# EAGLE board final_design_v1 (EAGLE 9.4.0)
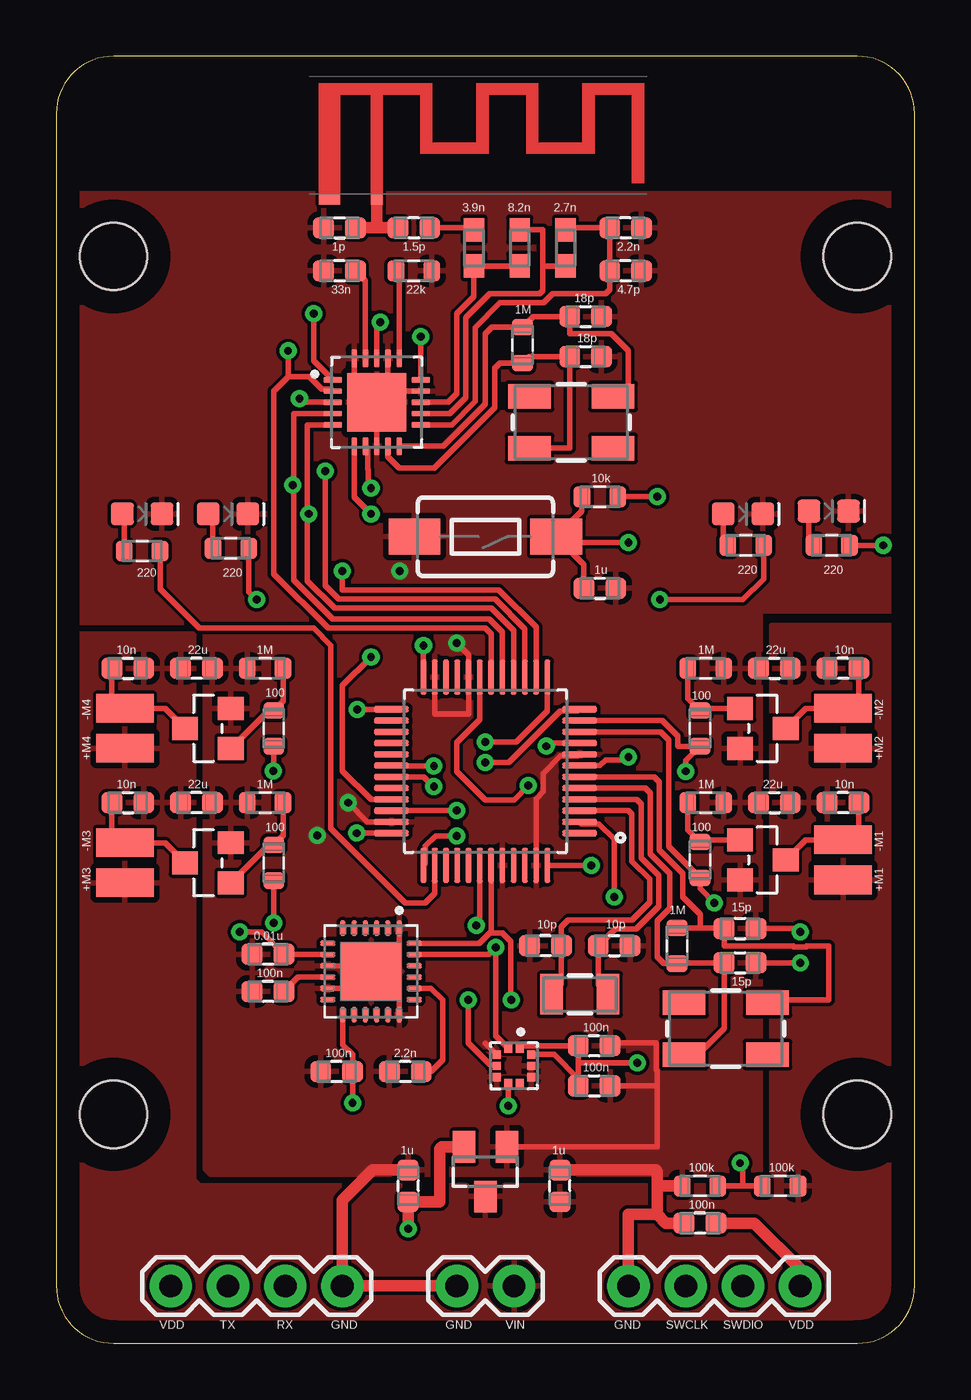
[diagram p0: board, top side]
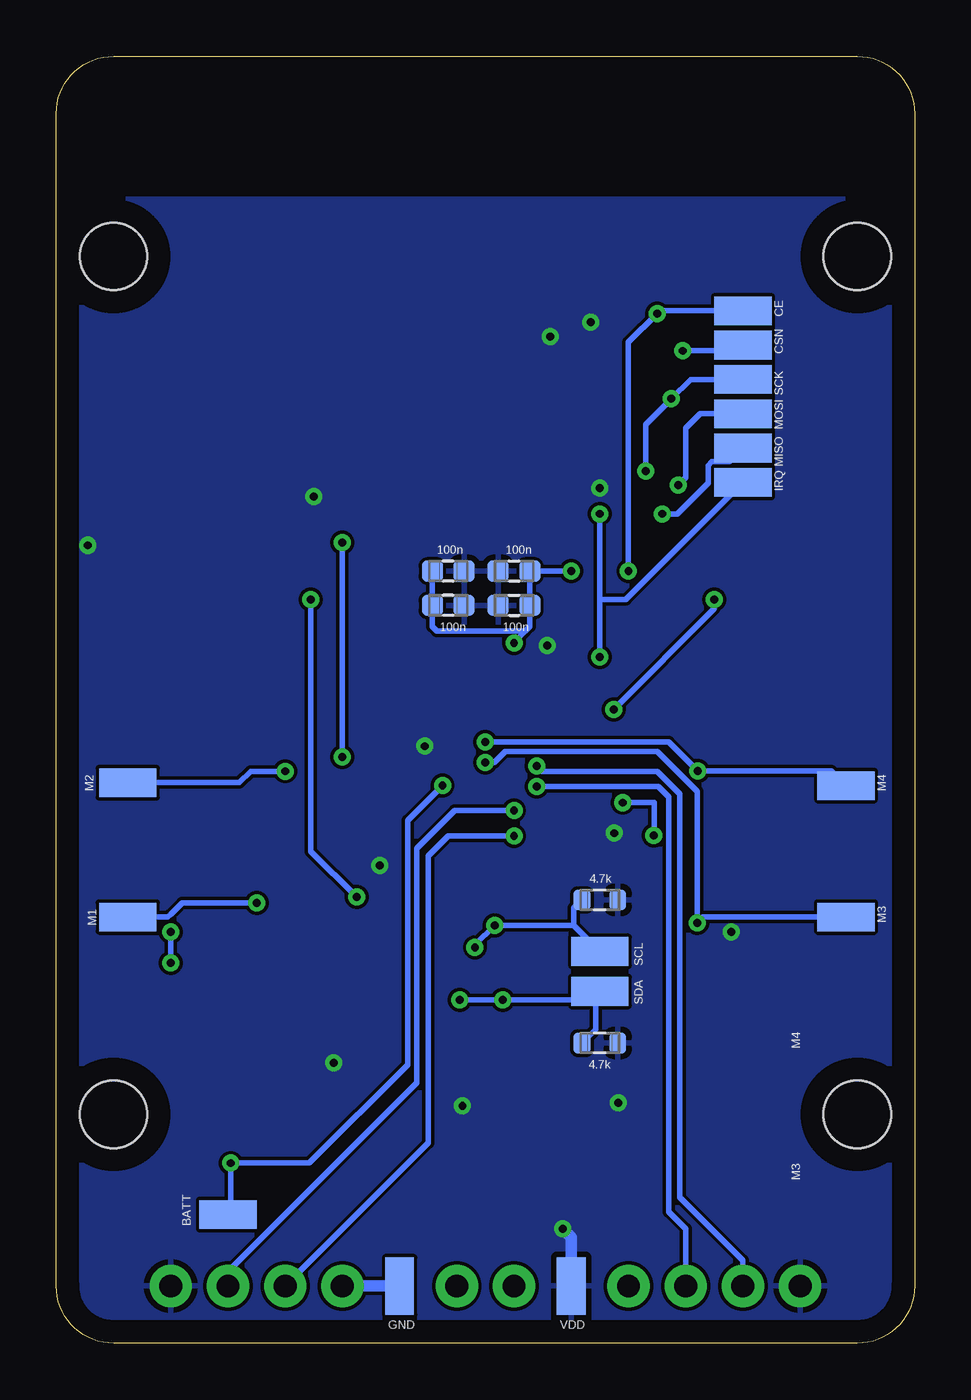
[diagram p1: board, bottom side, seen from below]

Size 38.1 x 57.15 mm. Coordinates in mm from the lower left corner, seen from the top.
Outline: 35.56,57.15 2.54,57.15 arc90 0,54.61 0,2.54 arc90 2.54,0 35.56,0 arc90 38.1,2.54 38.1,54.61 arc90 35.56,57.15
Copper layers (1*16): Top 0.035mm / dielectric 1.5mm / Bottom 0.035mm
Design rules "default": minimum track width 6mil, minimum drill 0.35mm, track to track 6mil, track to pad 6mil, pad to pad 6mil, via to via 6mil, smd to smd 6mil, copper to edge 40mil, drill to drill 6mil, minimum pad ring 10mil, minimum via ring 8mil, stop-mask expansion 4mil, vias tented up to drill 0mil, thermal gap 10mil
Holes 3 mm at 2.54,10.16 35.56,48.26 2.54,48.26 35.56,10.16

## Footprints (pad centres in the part's own frame; a part is rotated, then mirrored left to right if it is on the bottom)
SMD1,27-2,54 = smd 1.27 x 2.54: 1 0,0
CAP_0603 = smd 0.92 x 0.93: 1 -0.705,0; 2 0.705,0
LED-0603 = smd 1 x 1: A -0.877,0; C 0.877,0
TRACE_ANTENNA_2.4GHZ_15.2MM = smd 0.5 x 0.5: ANT 0,-0.25 | smd 0.9 x 0.5: GND -2.1,-0.25
SOT23 = smd 1 x 1.4: 1 -0.95,-1.1; 2 0.95,-1.1; 3 0,1.1
1X04 = drill 1.016 pad 1.88: 1 0,0; 2 2.54,0; 3 5.08,0; 4 7.62,0
1X02 = drill 1.016 pad 1.88: 1 0,0; 2 2.54,0
SOT-23 = smd 1.016 x 1.143: 1 -0.889,-1.016; 2 0.889,-1.016; 3 0,1.016
RES_0603 = smd 0.74 x 0.93: 1 -0.795,0; 2 0.795,0
TACTILE-SWITCH-1101NE = smd 2.3 x 1.6: 1 -3.15,0; 2 3.15,0
QFP50P900X900X160-48N = smd 1.56 x 0.28: 1 -4.18,2.75; 2 -4.18,2.25; 3 -4.18,1.75; 4 -4.18,1.25; 5 -4.18,0.75; 6 -4.18,0.25; 7 -4.18,-0.25; 8 -4.18,-0.75; 9 -4.18,-1.25; 10 -4.18,-1.75; 11 -4.18,-2.25; 12 -4.18,-2.75; 25 4.18,-2.75; 26 4.18,-2.25; 27 4.18,-1.75; 28 4.18,-1.25; 29 4.18,-0.75; 30 4.18,-0.25; 31 4.18,0.25; 32 4.18,0.75; 33 4.18,1.25; 34 4.18,1.75; 35 4.18,2.25; 36 4.18,2.75 | smd 0.28 x 1.56: 13 -2.75,-4.18; 14 -2.25,-4.18; 15 -1.75,-4.18; 16 -1.25,-4.18; 17 -0.75,-4.18; 18 -0.25,-4.18; 19 0.25,-4.18; 20 0.75,-4.18; 21 1.25,-4.18; 22 1.75,-4.18; 23 2.25,-4.18; 24 2.75,-4.18; 37 2.75,4.18; 38 2.25,4.18; 39 1.75,4.18; 40 1.25,4.18; 41 0.75,4.18; 42 0.25,4.18; 43 -0.25,4.18; 44 -0.75,4.18; 45 -1.25,4.18; 46 -1.75,4.18; 47 -2.25,4.18; 48 -2.75,4.18
24-VFQFN = smd 0.26 x 0.69: 1 -1.25,-1.92; 2 -0.75,-1.92; 3 -0.25,-1.92; 4 0.25,-1.92; 5 0.75,-1.92; 6 1.25,-1.92; 13 1.25,1.92; 14 0.75,1.92; 15 0.25,1.92; 16 -0.25,1.92; 17 -0.75,1.92; 18 -1.25,1.92 | smd 0.69 x 0.26: 7 1.92,-1.25; 8 1.92,-0.75; 9 1.92,-0.25; 10 1.92,0.25; 11 1.92,0.75; 12 1.92,1.25; 19 -1.92,1.25; 20 -1.92,0.75; 21 -1.92,0.25; 22 -1.92,-0.25; 23 -1.92,-0.75; 24 -1.92,-1.25 | smd 2.7 x 2.6: 25 0,0
QFN50P400X400X95-21N = smd 0.81 x 0.26: 1 -1.95,1; 2 -1.95,0.5; 3 -1.95,0; 4 -1.95,-0.5; 5 -1.95,-1; 11 1.95,-1; 12 1.95,-0.5; 13 1.95,0; 14 1.95,0.5; 15 1.95,1 | smd 0.26 x 0.81: 6 -1,-1.95; 7 -0.5,-1.95; 8 0,-1.95; 9 0.5,-1.95; 10 1,-1.95; 16 1,1.95; 17 0.5,1.95; 18 0,1.95; 19 -0.5,1.95; 20 -1,1.95 | smd 2.6 x 2.6: 21 0,0
PQFN50P200X200X80-10N = smd 0.35 x 0.38: 1 -0.765,0.25; 2 -0.765,-0.25; 3 -0.5,-0.765; 4 0,-0.765; 5 0.5,-0.765; 6 0.765,-0.25; 7 0.765,0.25; 8 0.5,0.765; 9 0,0.765; 10 -0.5,0.765
RESC0603_N = smd 1.05 x 0.9: 1 -0.8,0; 2 0.8,0
CRYSTAL-SMD-5X3.2-4PAD = smd 1.9 x 1.1: 1 -1.85,-1.15; 2 1.85,-1.15; 3 1.85,1.15; 4 -1.85,1.15
CRYSTAL-SMD-3.2X1.5MM = smd 1 x 1.8: P$1 -1.25,0; P$2 1.25,0

## Placement (x,y rotation side)
+M1  [SMD1,27-2,54]  34.92,20.57 90 top
+M2  [SMD1,27-2,54]  34.92,26.42 90 top
+M3  [SMD1,27-2,54]  3.05,20.45 90 top
+M4  [SMD1,27-2,54]  3.05,26.42 90 top
+M5  [SMD1,27-2,54]  13.97,15.62 270 bottom
+M6  [SMD1,27-2,54]  13.97,17.4 270 bottom
+M7  [SMD1,27-2,54]  3.05,24.77 90 bottom
+M8  [SMD1,27-2,54]  3.05,18.92 270 bottom
+M9  [SMD1,27-2,54]  34.92,24.89 270 bottom
+M10  [SMD1,27-2,54]  34.92,18.92 270 bottom
+M13  [SMD1,27-2,54]  7.62,45.85 270 bottom
+M14  [SMD1,27-2,54]  7.62,44.32 270 bottom
+M15  [SMD1,27-2,54]  7.62,41.27 270 bottom
+M16  [SMD1,27-2,54]  7.62,39.75 270 bottom
+M17  [SMD1,27-2,54]  7.62,38.23 270 bottom
+M18  [SMD1,27-2,54]  15.24,2.54 0 bottom
+M19  [SMD1,27-2,54]  22.86,2.54 0 bottom
+M20  [SMD1,27-2,54]  30.48,5.71 90 bottom
+M22  [SMD1,27-2,54]  7.62,42.8 270 bottom
-M1  [SMD1,27-2,54]  34.92,22.35 90 top
-M2  [SMD1,27-2,54]  34.92,28.19 90 top
-M3  [SMD1,27-2,54]  3.05,22.23 90 top
-M4  [SMD1,27-2,54]  3.05,28.19 90 top
C1  10n  [CAP_0603]  34.92,24 180 top
C2  22u  [CAP_0603]  31.88,24 0 top
C3  100n  [CAP_0603]  9.4,15.62 180 top
C4  0.01u  [CAP_0603]  9.4,17.27 180 top
C5  100n  [CAP_0603]  12.45,12.06 180 top
C6  2.2n  [CAP_0603]  15.49,12.06 180 top
C7  18p  [CAP_0603]  23.5,45.59 0 top
C8  18p  [CAP_0603]  23.5,43.81 0 top
C9  1.5p  [CAP_0603]  15.88,49.53 180 top
C10  1p  [CAP_0603]  12.57,49.53 0 top
C11  4.7p  [CAP_0603]  25.27,47.62 180 top
C12  2.2n  [CAP_0603]  25.27,49.53 180 top
C13  33n  [CAP_0603]  12.57,47.62 180 top
C14  100n  [CAP_0603]  23.88,11.43 0 top
C15  100n  [CAP_0603]  23.88,13.21 180 top
C16  15p  [CAP_0603]  30.35,16.89 0 top
C17  15p  [CAP_0603]  30.35,18.41 0 top
C18  100n  [CAP_0603]  20.7,32.77 180 bottom
C19  100n  [CAP_0603]  20.7,34.29 180 bottom
C20  100n  [CAP_0603]  17.78,32.77 0 bottom
C21  100n  [CAP_0603]  17.78,34.29 0 bottom
C22  1u  [CAP_0603]  24.13,33.53 0 top
C23  10n  [CAP_0603]  34.92,29.97 180 top
C24  1u  [CAP_0603]  22.35,6.99 90 top
C25  1u  [CAP_0603]  15.62,6.99 90 top
C29  100n  [CAP_0603]  28.57,5.33 180 top
C30  10p  [CAP_0603]  21.72,17.65 180 top
C31  10p  [CAP_0603]  24.77,17.65 0 top
C32  22u  [CAP_0603]  31.88,29.97 0 top
C33  10n  [CAP_0603]  3.17,24 0 top
C34  22u  [CAP_0603]  6.22,24 180 top
C35  10n  [CAP_0603]  3.17,29.97 0 top
C36  22u  [CAP_0603]  6.22,29.97 180 top
D1  [LED-0603]  34.29,36.96 0 top
D2  [LED-0603]  30.48,36.83 0 top
D3  [LED-0603]  3.81,36.83 0 top
D4  [LED-0603]  7.62,36.83 0 top
E1  ANTENNA-GROUNDEDTRACE-15.2MM  [TRACE_ANTENNA_2.4GHZ_15.2MM]  14.22,51.05 0 top
IC1  MCP1700  [SOT23]  19.05,7.62 180 top
J1  [1X04]  12.7,2.54 180 top
J2  [1X04]  25.4,2.54 0 top
J3  [1X02]  17.78,2.54 0 top
Q1  SI2300  [SOT-23]  31.37,21.46 270 top
Q2  SI2300  [SOT-23]  31.37,27.3 270 top
Q3  SI2300  [SOT-23]  6.73,21.34 90 top
Q4  SI2300  [SOT-23]  6.73,27.3 90 top
R1  220  [RES_0603]  30.61,35.43 180 top
R2  22k  [RES_0603]  15.88,47.62 0 top
R3  1M  [RES_0603]  27.56,17.65 270 top
R4  1M  [RES_0603]  20.7,44.32 270 top
R5  10k  [RES_0603]  24.13,37.59 0 top
R6  220  [RES_0603]  34.42,35.43 180 top
R7  4.7k  [RES_0603]  13.97,19.68 0 bottom
R8  4.7k  [RES_0603]  13.97,13.34 0 bottom
R11  100  [RES_0603]  28.57,21.46 90 top
R12  1M  [RES_0603]  28.83,24 0 top
R13  100  [RES_0603]  28.57,27.3 90 top
R14  1M  [RES_0603]  28.83,29.97 0 top
R15  100  [RES_0603]  9.65,21.34 90 top
R16  1M  [RES_0603]  9.27,24 180 top
R17  100  [RES_0603]  9.65,27.3 90 top
R18  1M  [RES_0603]  9.27,29.97 180 top
R19  220  [RES_0603]  3.81,35.18 180 top
R20  220  [RES_0603]  7.75,35.31 180 top
R21  100k  [RES_0603]  32.13,6.99 180 top
R22  100k  [RES_0603]  28.57,6.99 180 top
S2  RS032G05A3SM-SPST-MOMENTARY-SWSMD-1101NE  [TACTILE-SWITCH-1101NE]  19.05,35.81 180 top
U1  STM32F103C8T6  [QFP50P900X900X160-48N]  19.05,25.4 180 top
U2  MPU-6050  [24-VFQFN]  13.97,16.51 180 top
U4  NRF24L01  [QFN50P400X400X95-21N]  14.22,41.78 0 top
U6  BMP388  [PQFN50P200X200X80-10N]  20.32,12.32 270 top
U$1  8.2n  [RESC0603_N]  20.57,48.64 90 top
U$2  2.7n  [RESC0603_N]  22.61,48.64 90 top
U$3  3.9n  [RESC0603_N]  18.54,48.64 90 top
Y1  8MHz  [CRYSTAL-SMD-5X3.2-4PAD]  29.72,13.97 0 top
Y3  16MHz  [CRYSTAL-SMD-5X3.2-4PAD]  22.86,40.89 0 top
Y4  32.768kHz  [CRYSTAL-SMD-3.2X1.5MM]  23.24,15.49 0 top

## Library data of the parts
+M1-+M10 +M13-+M20 +M22 -M1--M4 = wirepad
C1-C25 C29-C36 = Resistor_Capacitor; CREATED_BY: PCBLayout.com; DIGIKEY_PART_NUMBER: 399-7814-2-ND; MANUFACTURER: KEMET; MPN: C0603C100C5GACTU; PACKAGE: SMD 0603
D1-D4 = SparkFun-LED
E1 = SparkFun-RF
IC1 = linear
J1 J2 = SparkFun-Connectors; PROD_ID: CONN-09696
J3 = SparkFun-Connectors
Q1-Q4 = OPL_Discrete_Semiconductor; MPN: 2N7002,215
R1-R8 R11-R22 = Resistor_Capacitor; CREATED_BY: PCBLayout.com; DIGIKEY_PART_NUMBER: 311-0.0GRTR-ND; MANUFACTURER: Yageo; MPN: RC0603JR-070RL; PACKAGE: SMD 0603
S2 = BeagleBone_Blue_R3; PROD_ID: SWCH-00815
U1 = STM32F103C8T6; AVAILABILITY: Warning; DESCRIPTION: ARM® Cortex®-M3 STM32F1 Microcontroller IC 32-Bit 72MHz 64KB (64K x 8) FLASH 48-LQFP (7x7); MF: STMicroelectronics; MP: STM32F103C8T6; PACKAGE: LQFP-48 STMicroelectronics; PRICE: None; PURCHASE-URL: https://pricing.snapeda.com/search/part/STM32F103C8T6/?ref=eda; SPICEPREFIX: X
U2 = Sensor; CREATED_BY: PCBLayout.com; DIGIKEY_PART_NUMBER: 1428-1007-1-ND; MANUFACTURER: TDK InvenSense; MPN: MPU-6050; PACKAGE: 24-VFQFN
U4 = NRF24L01; AVAILABILITY: Warning; DESCRIPTION: IC RF TxRx Only General ISM > 1GHZ 2.4GHz 20-VFQFN Exposed Pad; MF: Nordic; MP: NRF24L01; PACKAGE: VFQFN-20 Nordic Semiconductor; PRICE: None; PURCHASE-URL: https://pricing.snapeda.com/search/part/NRF24L01/?ref=eda
U6 = BMP388; DESCRIPTION: Pressure Sensor 4.35PSI ~ 18.13PSI (30kPa ~ 125kPa) Absolute 10-WFLGA; DIGI-KEY_PART_NUMBER: 828-1079-1-ND; MF: Bosch Sensortec; MP: BMP388; PACKAGE: WFLGA-10 Bosch Tools; PURCHASE-URL: https://pricing.snapeda.com/search/part/BMP388/?ref=eda
U$1-U$3 = Nordic_nRF
Y1 = SparkFun-Clocks; PROD_ID: XTAL-09431
Y3 = SparkFun-Clocks; PROD_ID: XTAL-08218; SF_ID: COM-00094
Y4 = SparkFun-Clocks; PROD_ID: XTAL-13062

## Nets
ANT1: U4.12 U$1.2 U$2.1
ANT2: U4.13 U$1.1 U$3.1
BATT_READING: +M20.1 R21.2 R22.1 U1.19
CE: +M13.1 U1.14 U4.1
CSN: +M14.1 U1.18 U4.2
DEBUG_LED1: R1.1 U1.2
DEBUG_LED2: R19.1 U1.38
DEBUG_LED3: R20.1 U1.25
GND: +M19.1 C2.1 C3.2 C4.2 C5.2 C6.2 C7.2 C8.2 C10.1 C11.1 C12.1 C13.2 C14.2 C15.1 C16.2 C17.2 C18.2 C19.2 C20.2 C21.2 C22.2 C24.2 C25.2 C29.2 C30.2 C31.2 C32.1 C34.1 C36.1 D1.C D2.C D3.C D4.C E1.GND IC1.1 J1.1 J2.1 J3.1 Q1.2 Q2.2 Q3.2 Q4.2 R2.2 R12.2 R14.2 R16.2 R18.2 R22.2 S2.2 U1.8 U1.20 U1.23 U1.35 U1.44 U1.47 U2.1 U2.9 U2.11 U2.18 U2.25 U4.8 U4.14 U4.17 U4.20 U4.21 U6.3 U6.5 U6.8 U6.9
IRQ: +M17.1 U1.33 U4.6
M1_CTRL: +M10.1 R11.1 U1.10
M2_CTRL: +M9.1 R13.1 U1.11
M3_CTRL: +M8.1 R15.1 U1.12
M4_CTRL: +M7.1 R17.1 U1.13
MISO: +M16.1 U1.16 U4.5
MOSI: +M15.1 U1.17 U4.4
N$1: -M1.1 C1.1 Q1.3
N$2: C3.1 U2.10
N$3: C6.1 U2.20
N$4: D1.A R6.2
N$6: D2.A R1.2
N$7: C8.1 R4.2 U4.9 Y3.1
N$8: C7.1 R4.1 U4.10 Y3.3
N$9: R2.1 U4.16
N$10: -M2.1 C23.1 Q2.3
N$11: Q1.1 R11.2 R12.1
N$12: C9.2 C10.2 E1.ANT
N$13: C9.1 U$3.2
N$14: Q2.1 R13.2 R14.1
N$15: -M3.1 C33.1 Q3.3
N$16: Q3.1 R15.2 R16.1
N$17: C13.1 U4.19
N$18: -M4.1 C35.1 Q4.3
N$19: Q4.1 R17.2 R18.1
N$20: D3.A R19.2
N$21: D4.A R20.2
OSC32_IN: C30.1 U1.3 Y4.P$1
OSC32_OUT: C31.1 U1.4 Y4.P$2
OSC_IN: C16.1 R3.2 U1.5 Y1.1
OSC_OUT: C17.1 R3.1 U1.6 Y1.3
RESET: C22.1 R5.1 S2.1 U1.7
SCK: +M22.1 U1.15 U4.3
SCL1: +M6.1 R7.1 U1.42 U2.23 U6.2
SDA1: +M5.1 R8.1 U1.43 U2.24 U6.4
SWCLK: J2.2 U1.37
SWDIO: J2.3 U1.34
UART_RX: J1.2 U1.31
UART_TX: J1.3 U1.30
VDD: +M18.1 C4.1 C5.1 C14.1 C15.2 C18.1 C19.1 C20.1 C21.1 C25.1 C29.1 IC1.2 J1.4 J2.4 R5.2 R6.1 R7.2 R8.2 U1.9 U1.24 U1.36 U1.48 U2.8 U2.13 U4.7 U4.15 U4.18 U6.1 U6.6 U6.10
VDD_PA: C11.2 C12.2 U4.11 U$2.2
VIN: +M1.1 +M2.1 +M3.1 +M4.1 C1.2 C2.2 C23.2 C24.1 C32.2 C33.2 C34.2 C35.2 C36.2 IC1.3 J3.2 R21.1

## Tracks (layer width: path | path; a pad name or v marks a point on that pad's centre or on a via)
ANT1
  Top 0.254: U$2.1 21.59,47.84 | U$1.2 21.59,49.44 21.59,47.84 | 21.59,47.84 21.59,46.74 21.46,46.61 19.24,46.61 18.19,45.55 18.19,42 17.47,41.28 U4.12
ANT2
  Top 0.254: U$1.1 U$3.1 18.54,46.48 17.78,45.72 17.78,42.16 17.4,41.78 U4.13
BATT_READING  (via drill 0.35)
  Top 0.254: R22.1 30.48,6.99 | 30.48,6.99 R21.2 | U1.19 18.8,27.69 17.78,26.67 17.78,25.4 19.05,24.13 20.32,24.13 v20.95,24.77 | v30.35,8 30.48,7.87 30.48,6.99
  Bottom 0.254: v20.95,24.77 22.5,23.22 22.5,12.36 26.86,8 v30.35,8 30.35,5.84 +M20.1
CE  (via drill 0.35)
  Top 0.254: U1.14 21.3,31.8 19.65,33.45 12.7,33.45 v12.7,34.29 | U4.1 11.43,43.63 v11.43,45.72
  Bottom 0.254: v12.7,34.29 12.7,44.45 v11.43,45.72 11.3,45.85 +M13.1
CSN  (via drill 0.35)
  Top 0.254: U1.18 19.3,31.5 19.05,31.75 12.06,31.75 9.65,34.16 9.65,41.91 9.65,42.29 10.29,42.93 | U4.2 12.18,42.37 11.77,42.37 11.22,42.93 10.29,42.93 | 10.29,42.93 v10.29,44.07
  Bottom 0.254: v10.29,44.07 7.87,44.07 +M14.1
DEBUG_LED1  (via drill 0.35)
  Top 0.254: U1.2 23.31,23.07 24.09,23.07 24.77,22.39 v24.77,19.81 | v26.8,33.02 30.48,33.02 31.4,33.94 R1.1
  Bottom 0.254: v24.77,19.81 26.8,21.84 v26.8,33.02
DEBUG_LED2
  Top 0.254: U1.38 16.8,19.98 16.38,19.56 15.5,19.56 12.19,22.86 12.19,30.99 11.43,31.75 6.35,31.75 4.61,33.49 R19.1
DEBUG_LED3  (via drill 0.35)
  Top 0.254: U1.25 v13.36,28.15 | v8.89,33.02 8.54,33.37 R20.1
  Bottom 0.254: v13.36,28.15 8.89,32.62 v8.89,33.02
GND  (via drill 0.35)
  Top 0.254: U4.17 14.72,42.28 | U4.21 14.72,42.28 | 14.72,42.28 U4.14 | U2.11 13.22,15.76 U2.25 | U2.9 13.72,16.76 U2.25 | U2.1 15.22,16.76 14.97,16.51 U2.25 | U2.25 15.22,15.26 U2.18 | U4.20 13.22,42.43 13.21,42.42 13.84,41.78 U4.21 | U6.3 19.05,13.32 | U1.35 13.81,23.15 v12.95,24 | U1.23 16.8,27.94 18.29,27.94 18.3,27.95 U1.20 18.3,30.57 v17.78,31.09 | U4.8 U4.21 | U1.8 23.15,26.07 22.38,26.07 21.61,25.31 21.61,24.49 21.3,24.18 U1.47 | C15.1 24.71,13.34 26.64,13.34 26.64,12.15 26.67,12.12 26.67,11.43 | C14.2 26.67,11.43 | IC1.1 26.67,8.72 26.67,11.43 | C16.2 v33.02,16.89 | v33.02,18.27 32.87,18.41 C17.2
  Top 0.508: C25.2 14.04,7.69 12.7,6.35 J1.1 J3.1 | J2.1 25.4,5.71 26.67,5.71 | 26.67,5.71 26.67,6.99 | 26.67,6.99 26.67,7.62 26.6,7.69 C24.2 | R22.2 26.67,6.99 | C29.2 27.05,5.33 26.67,5.71
  Bottom 0.254: v15.24,34.29 C21.2 C20.2 17.07,31.82 17.27,31.62 | 17.27,31.62 21.21,31.62 21.41,31.82 C18.2 C19.2 | v12.95,24 11.56,24 11.56,22.57 v11.58,22.55 | 17.27,31.62 17.78,31.11 v17.78,31.09 | v33.02,16.89 v33.02,18.27
  Bottom 0.508: +M19.1 J2.1
  pour Top: 6.6,7.75 6.6,32 0.13,32 0.13,50.8 0.38,51.05 38.1,51.05 38.1,32.51 31.24,32.51 31.24,7.49 6.86,7.49
IRQ  (via drill 0.35)
  Top 0.254: U1.33 13.97,24.15 12.7,25.42 12.7,29.21 v13.97,30.48 | v13.97,36.83 13.22,37.58 U4.6
  Bottom 0.254: v13.97,30.48 13.97,33.02 | 13.97,33.02 v13.97,36.83 | +M17.1 12.83,33.02 13.97,33.02
M1_CTRL  (via drill 0.35)
  Top 0.254: U1.10 26.82,27.15 27.18,26.8 27.18,22.07 R11.1 28.57,20.19 v29.21,19.56
  Bottom 0.254: +M10.1 33.15,18.92 33.02,19.05 32.51,19.56 v29.21,19.56
M2_CTRL  (via drill 0.35)
  Top 0.254: U1.11 26.9,27.65 27.58,26.96 27.58,26.54 27.62,26.51 R13.1 27.94,25.88 v27.94,25.4
  Bottom 0.254: +M9.1 29.97,24.89 29.46,25.4 v27.94,25.4
M3_CTRL  (via drill 0.35)
  Top 0.254: U1.12 23.15,28.07 22.38,28.07 20.09,25.78 v19.05,25.78 | v9.65,18.67 R15.1
  Bottom 0.254: v19.05,25.78 18.67,25.78 18.16,26.29 11.43,26.29 9.65,24.51 v9.65,18.67 9.4,18.92 +M8.1
M4_CTRL  (via drill 0.35)
  Top 0.254: U1.13 21.8,28.07 20.42,26.69 v19.05,26.69 | v9.63,25.42 9.65,25.44 R17.1
  Bottom 0.254: v19.05,26.69 10.91,26.69 v9.63,25.42 3.7,25.42 +M7.1
MISO  (via drill 0.35)
  Top 0.254: U1.16 20.3,31.65 19.31,32.64 16.51,32.64 12.36,32.64 11.15,33.85 11.15,36.83 | 11.15,36.83 11.15,40.77 11.17,40.78 U4.5 | 11.15,36.83 v11.2,36.83
  Bottom 0.254: v11.2,36.83 10.54,36.83 9.17,38.2 9.17,38.98 9.01,39.14 8.23,39.14 +M16.1
MOSI  (via drill 0.35)
  Top 0.254: U1.17 19.8,31.57 19.22,32.16 12.27,32.16 10.54,33.89 10.54,38.1 | U4.4 10.54,41.28 10.54,38.1 | 10.54,38.1 v10.49,38.1
  Bottom 0.254: v10.49,38.1 10.16,38.43 10.16,40.64 9.53,41.27 +M15.1
N$1
  Top 0.254: Q1.3 33.27,22.35 -M1.1 35.38,22.35 35.63,22.61 C1.1
N$2
  Top 0.254: C3.1 10.74,16.26 U2.10
N$3
  Top 0.254: U2.20 16.62,15.76 17.14,15.24 17.14,12.57 16.64,12.06 C6.1
N$4
  Top 0.254: R6.2 33.41,35.64 D1.A
N$6
  Top 0.254: R1.2 29.6,35.64 D2.A
N$7
  Top 0.254: Y3.1 22.79,39.74 C8.1 20.99,43.81 R4.2 19.68,43.53 19.46,43.31 19.46,41.54 16.78,38.86 15.23,38.86 14.72,39.37 U4.9
N$8
  Top 0.254: Y3.3 25.4,42.04 25.4,44.07 24.64,44.83 22.79,44.83 C7.1 21.18,45.59 R4.1 19.34,45.12 19.05,44.83 19.05,41.71 17.17,39.83 U4.10
N$9
  Top 0.254: R2.1 15.22,47.48 U4.16
N$10
  Top 0.254: Q2.3 33.27,28.19 -M2.1 35.05,28.07 35.63,28.07 C23.1
N$11
  Top 0.254: Q1.1 28.67,22.35 R11.2 28.03,22.8 R12.1
N$12
  Top 0.508: E1.ANT 14.22,49.53 | 14.22,49.53 C10.2 | 14.22,49.53 C9.2
N$13
  Top 0.254: C9.1 18.45,49.53 U$3.2
N$14
  Top 0.254: R14.1 28.03,28.64 R13.2 28.67,28.19 Q2.1
N$15
  Top 0.254: Q3.3 4.83,22.23 -M3.1 2.47,22.8 C33.1
N$16
  Top 0.254: Q3.1 9.43,22.13 R15.2 10.07,22.55 R16.1
N$17
  Top 0.254: C13.1 13.72,47.18 U4.19
N$18
  Top 0.254: Q4.3 4.83,28.19 -M4.1 2.85,28.19 2.47,28.57 C35.1
N$19
  Top 0.254: Q4.1 9.43,28.1 R17.2 10.07,28.51 R18.1
N$20
  Top 0.254: D3.A 3.02,36.75 R19.2
N$21
  Top 0.254: D4.A 6.95,36.62 R20.2
OSC32_IN
  Top 0.254: Y4.P$1 22.42,15.93 C30.1 22.42,18.48 22.73,18.8 24.63,18.8 24.64,18.8 25.57,18.8 26.34,19.57 26.34,20.61 25.55,21.39 25.55,23.5 25.4,23.65 U1.3
OSC32_OUT
  Top 0.254: Y4.P$2 24.06,15.93 C31.1 24.8,18.4 25.74,18.4 26.74,19.4 26.74,20.77 25.96,21.56 25.96,23.95 25.76,24.15 U1.4
OSC_IN
  Top 0.254: U1.5 26.15,24.65 26.36,24.43 26.36,21.73 27.22,20.87 27.22,19.3 26.67,18.75 26.67,17.14 26.96,16.86 R3.2 27.59,16.89 C16.1 29.65,13.97 28.5,12.82 Y1.1
OSC_OUT
  Top 0.254: U1.6 26.54,25.15 26.77,24.92 26.77,21.9 27.81,20.86 27.81,19.81 28.57,19.05 28.57,18.45 | Y1.3 31.72,15.27 31.75,15.24 34.29,15.24 34.29,17.64 33.32,17.64 33.29,17.61 32.75,17.61 32.72,17.64 29.65,17.64 C17.1 29.61,18.45 28.57,18.45 | R3.1 28.57,18.45
RESET  (via drill 0.35)
  Top 0.254: U1.7 24.13,25.65 24.39,25.91 25.27,25.91 v25.4,26.04 | v25.4,35.56 22.45,35.56 S2.1 | S2.1 23.43,34.59 C22.1 | S2.1 23.34,36.95 R5.1
  Bottom 0.254: v25.4,26.04 v25.4,35.56
SCK  (via drill 0.35)
  Top 0.254: U1.15 20.8,31.72 19.48,33.05 12.53,33.05 11.94,33.64 v11.94,38.73 | U4.3 10.95,41.78 v10.79,41.94
  Bottom 0.254: v11.94,38.73 11.94,40.8 10.87,41.86 v10.79,41.94 9.94,42.8 +M22.1
SCL1  (via drill 0.35)
  Top 0.254: U2.23 19.21,17.26 v19.52,17.57 19.52,13.64 U6.2 | U1.42 18.8,18.71 v18.64,18.56
  Bottom 0.254: v19.52,17.57 19.52,17.68 v18.64,18.56 15.13,18.56 | +M6.1 15.13,18.56 | R7.1 15.13,19.32 15.13,18.56
SDA1  (via drill 0.35)
  Top 0.254: U1.43 19.3,18.28 | U2.24 18.78,17.76 19.3,18.28 | 19.3,18.28 19.36,18.23 19.79,18.23 20.17,17.84 20.17,15.26 v20.19,15.24 | U6.4 19.51,12.37 19.26,12.37 18.29,13.34 v18.29,15.24
  Bottom 0.254: v20.19,15.24 v18.29,15.24 14.35,15.24 14.16,15.43 | 14.16,15.43 +M5.1 | R8.1 14.16,13.94 14.16,15.43
SWCLK  (via drill 0.35)
  Top 0.254: U1.37 16.38,21.3 16.38,22.07 16.84,22.53 v17.78,22.53
  Bottom 0.254: v17.78,22.53 20.7,22.53 21.59,21.64 21.59,8.89 J2.2
SWDIO  (via drill 0.35)
  Top 0.254: U1.34 v17.78,23.65
  Bottom 0.254: v17.78,23.65 20.42,23.65 22.1,21.97 22.1,11.56 30.48,3.17 J2.3
UART_RX  (via drill 0.35)
  Top 0.254: U1.31 16.31,25.15 16.49,24.97 16.51,24.97 v16.76,24.72
  Bottom 0.254: J1.2 10.16,5.08 10.92,5.84 10.92,24.26 11.38,24.72 v16.76,24.72
UART_TX  (via drill 0.35)
  Top 0.254: U1.30 14.89,25.63 v16.76,25.63
  Bottom 0.254: v16.76,25.63 16.54,25.4 11.43,25.4 10.41,24.38 10.41,6.48 7.62,3.68 J1.3
VDD  (via drill 0.35)
  Top 0.254: U2.13 12.72,13.26 13.15,12.83 C5.1 v13.15,10.67 | U2.8 10.12,17.26 C4.1 9.11,18.27 v8.15,18.27 | U6.1 20.69,13.21 C15.2 23.17,12.45 | U6.10 22.1,12.82 23.17,11.75 C14.1 23.17,12.45 | U1.48 23.74,21.22 v23.75,21.21 | v21.75,26.51 21.89,26.65 U1.9 | U1.36 v13.34,22.65 | U1.24 v16.3,30.99 | R5.2 v26.67,37.59 | v13.97,37.97 13.84,38.1 13.84,38.8 13.81,38.82 13.81,39.74 U4.7 | U4.18 14.22,45.18 v14.38,45.34 | U4.15 v16.17,44.7 | U6.6 v20.07,10.54 | R6.1 v36.71,35.43 | v25.78,12.45 23.17,12.45
  Top 0.508: IC1.2 17.1,8.72 17.02,8.64 17.02,6.28 C25.1 v15.62,5.08 | C29.1 30.99,5.33 33.02,3.3 J2.4
  Bottom 0.508: +M18.1 15.24,4.7 v15.62,5.08
  pour Bottom: -3.81,50.8 41.91,50.8 41.91,-3.81 -3.81,-3.81
VDD_PA
  Top 0.254: U$2.2 22.7,49.53 C12.2 C11.2 24.57,46.79 24.38,46.61 22.04,46.61 21.63,46.2 19.68,46.2 18.59,45.11 18.59,41.83 17.55,40.78 U4.11
VIN
  pour Top: 31.75,31.88 39.75,31.88 39.75,-1.27 -1.27,-1.27 -1.27,31.5 6.1,31.5 6.1,7.24 6.35,6.99 31.5,6.99 31.75,7.24

## Text on the board
tNames: -M4 | -M2 | +M4 | +M2 | -M3 | -M1 | +M3 | +M1 | VDD | TX | RX | GND | GND | VIN | GND | SWCLK | SWDIO | VDD
bNames: CE | CSN | SCK | MOSI | MISO | IRQ | M4 | M2 | M3 | M1 | SCL | SDA | M4 | M3 | BATT | VDD | GND | BATT